# Altium PCB 00.Main.PcbDoc
Units mm, origin at the board's own origin, x right, y up, seen from the top; angles counter-clockwise.
Board outline 95 x 70 mm, 2 copper layers (Top Layer, Bottom Layer); 12 components, 14 nets, 78 pads, 6 vias.
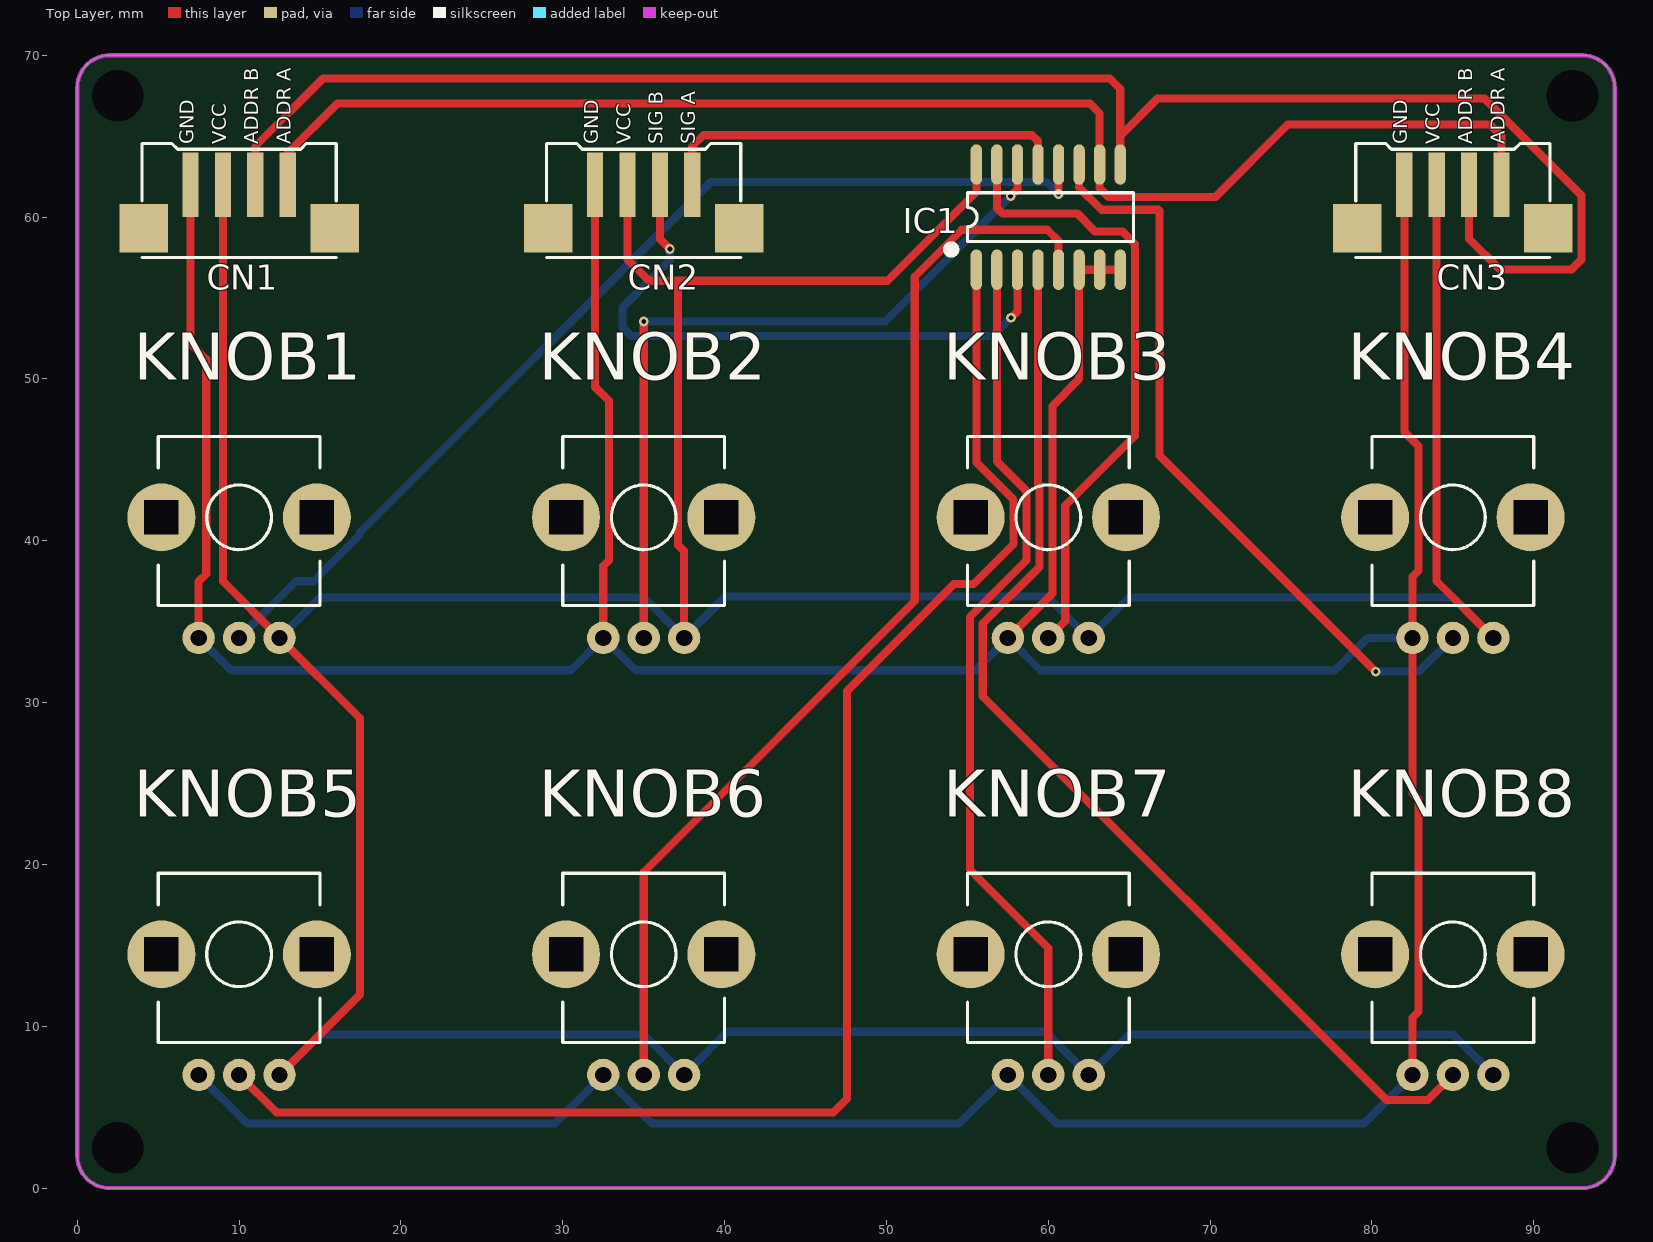
[diagram p0: Top Layer view]
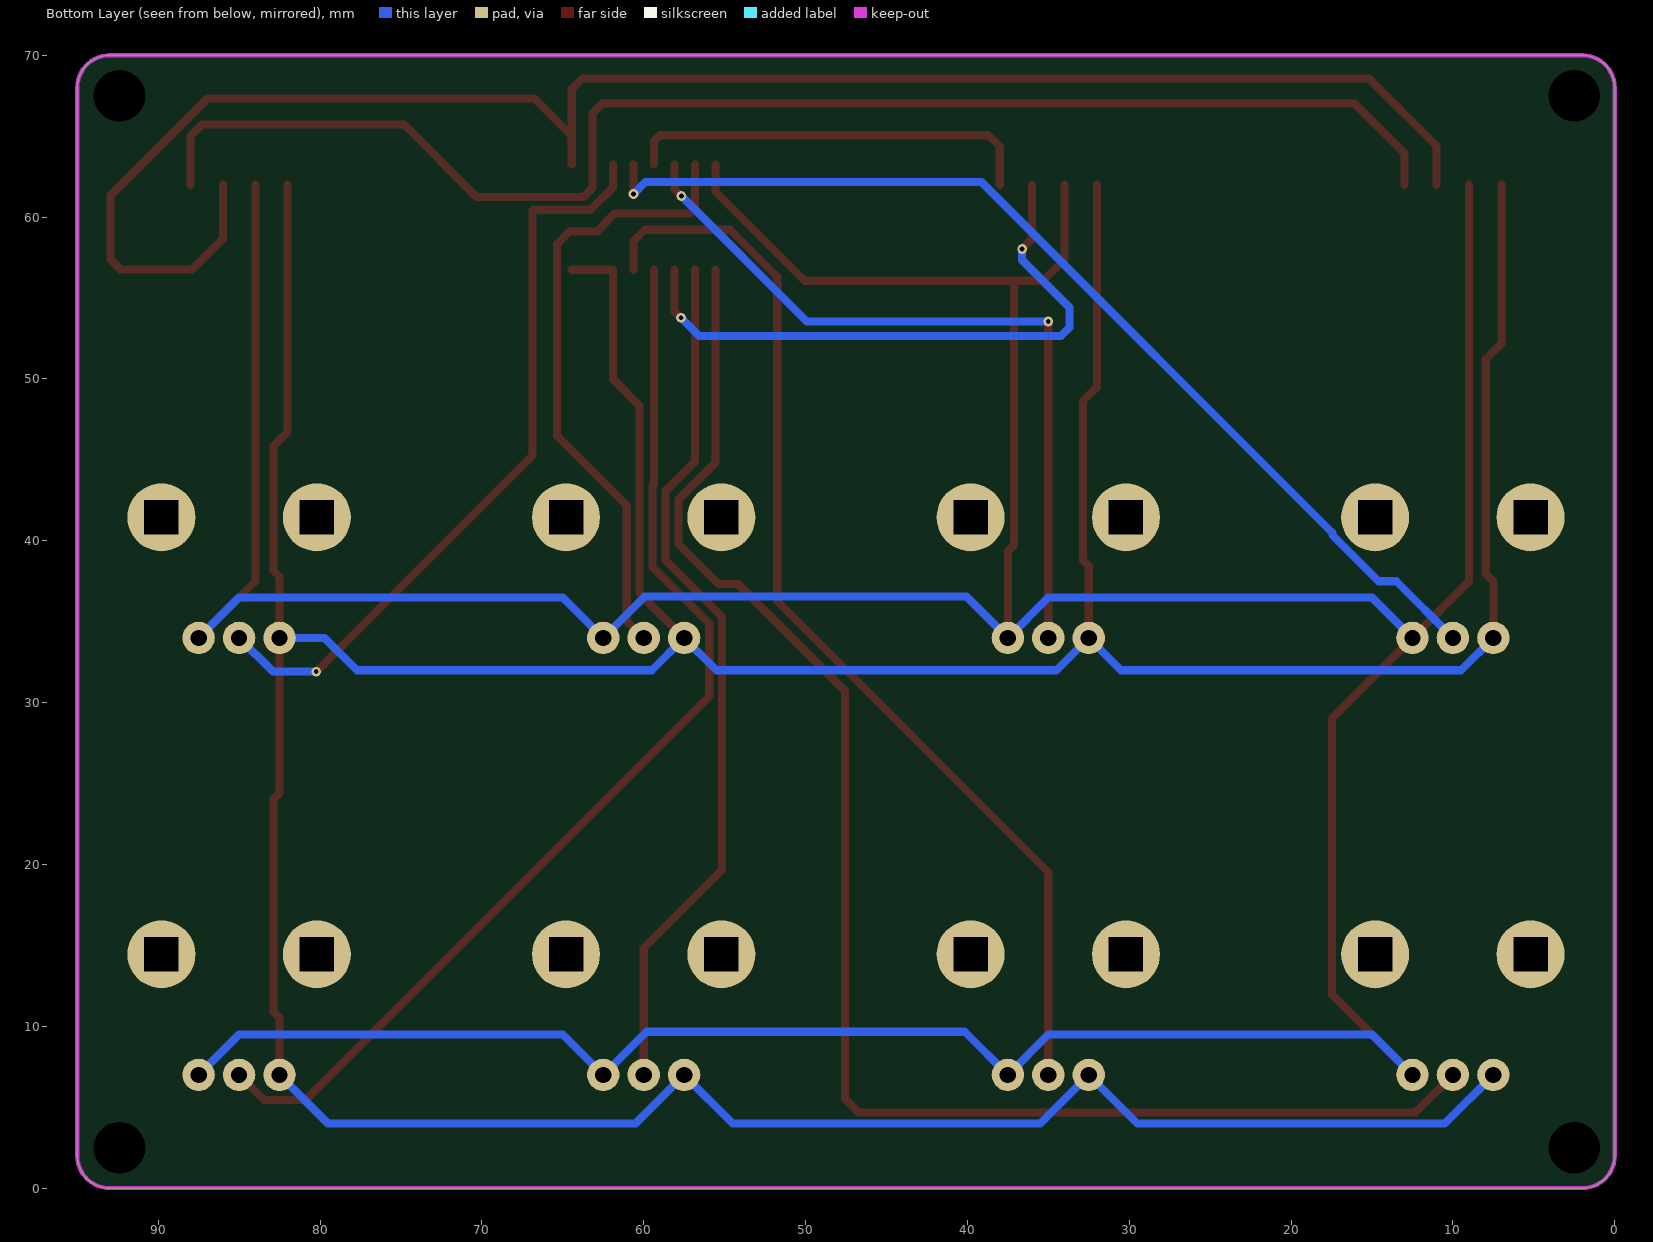
[diagram p1: Bottom Layer view, seen from below]

## Layer stack, top to bottom
Top Layer: signal copper 0.0356
Dielectric: dielectric 0.32, FR-4, Dk 4.8
Bottom Layer: signal copper 0.0356

## Board outline
0,2 0,68 cw(c2,68) 2,70 93,70 cw(c93,68) 95,68 95,2 cw(c93,2) 93,0 2,0 cw(c2,2)

## Design rules (kind name [scope] priority, off if disabled: settings)
Clearance [All] p1: gap=0.3
ComponentClearance [All] p1 off: gap=0.254 collisioncheckmode=3 verticalgap=0.254 showdistances=FALSE
HoleSize [All] p1: absolutevalues=TRUE maxlimit=30 minlimit=0.3 maxpercent=80.000 minpercent=20.000
PolygonConnect [All] p1: connectstyle=Relief reliefconductorwidth=0.5 reliefentries=4 polygonreliefangle="90 Angle" airgapwidth=0.5
RoutingVias [All] p1: holewidth=0.3 width=0.6 viastyle="Through Hole" minholewidth=0.3 minwidth=0.6 maxholewidth=0.3 maxwidth=0.6
SilkToSilkClearance [All] p1: silktosilkclearance=0
SilkToSolderMaskClearance [IsPad] p1: minsilkscreentomaskgap=0 clearancetoexposedcopper=TRUE
SolderMaskExpansion [All] p1: expansion=0.102
Width [All] p1: maxlimit=0.6 minlimit=0.3 preferedwidth=0.5 minimp=50.000000 maximp=50.000000 favimp=50.000000
24 further rules are at their usual default settings.

## Classes and differential pairs
component class "01.12 Knobs with 4052": CN1 CN2 IC1 KNOB1 KNOB2 KNOB3 KNOB4 KNOB5 KNOB6 KNOB7 KNOB8

## Components (designator, comment, footprint, x,y, rotation, side; value= is the part's Value field where it differs from the comment)
CN1 "2.54mm 1X4" GROVE-4P-180D 10,62 r0 top (schematic designator CN3)
CN2 "2.54mm 1X4" GROVE-4P-180D 35,62 r0 top (schematic designator CN1)
CN3 "2.54mm 1X4" GROVE-4P-180D 85,62 r0 top
IC1 "HD74HC4052P" SOIC16 60,60 r90 top
KNOB1 "VR Mono" RV09 10,34 r0 top
KNOB2 "VR Mono" RV09 35,34 r0 top
KNOB3 "VR Mono" RV09 60,34 r0 top
KNOB4 "VR Mono" RV09 85,34 r0 top
KNOB5 "VR Mono" RV09 10,7 r0 top
KNOB6 "VR Mono" RV09 35,7 r0 top
KNOB7 "VR Mono" RV09 60,7 r0 top
KNOB8 "VR Mono" RV09 85,7 r0 top

## Footprints (in the part's own frame and the unit in brackets; to place one, negate y for a bottom-side part, rotate by r counter-clockwise, add the part's x,y. Pads: shape width x height; smd on the part's side, far side on the other; paste and mask are expansions set on the pad)
GROVE-4P-180D [mm]
  rect 1x4 smd: 1(3,0) 2(1,0) 3(-1,0) 4(-3,0)
  rect 3x3 smd: ""(-5.9,-2.7) ""(5.9,-2.7)
  silkscreen extent -6,-4.5 6,2.55
RV09 [mm]
  round 4.2 hole 2.1 square: 0(-4.8,7.45) 0(4.8,7.45)
  round 2 hole 1: 1(-2.5,0) 2(0,0) 3(2.5,0)
  silkscreen extent -5,2 5,12.45
SOIC16 [mm]
  oval 2.5x0.7 smd: 1(-3.25,4.445) 2(-3.25,3.175) 3(-3.25,1.905) 4(-3.25,0.635) 5(-3.25,-0.635) 6(-3.25,-1.905) 7(-3.25,-3.175) 8(-3.25,-4.445) 9(3.25,-4.445) 10(3.25,-3.175) 11(3.25,-1.905) 12(3.25,-0.635) 13(3.25,0.635) 14(3.25,1.905) 15(3.25,3.175) 16(3.25,4.445)
  silkscreen extent -2.25,-5.27 1.5,6.25

## Part data
CN1 CN2 CN3: library part "Connector 1X4"
IC1: library part TC74HC4052AF

## Free pads (board coordinates)
  round 0 hole 3.2: 0(2.5,67.5) 0(2.5,2.5) 0(92.4,2.5) 0(92.4,67.5)

## Via types
v1: diameter 0.6, hole 0.3, Top Layer to Bottom Layer, 6 vias

## Nets (pads, with @x,y where several pads share a name; then routed paths per layer and width w, separated by ;. In a path a pad name is that pad's centre, name@x,y a point inside that pad or via, vN(x,y) a via of type N, cw(c..) or ccw(c..) an arc to the next point about the centre after c; other vN are vias at no path point)
ADDR_A: CN1.1 CN3.1 IC1.10 | length 88.5
  Top Layer w0.5: CN1.1 13,63.943 16.073,67.017 62.577,67.017 63.175,66.418 IC1.10 63.175,61.795 63.718,61.252 70.325,61.252 74.794,65.721 87.289,65.721 88,65.01 CN3.1
ADDR_B: CN1.2 CN3.2 IC1.9 | length 109.7
  Top Layer w0.5: CN1.2 11,64.375 15.191,68.566 63.796,68.566 64.445,67.917 64.445,65.01 ; IC1.9 64.445,65.01 ; CN3.2 86,58.66 87.905,56.755 92.32,56.755 92.955,57.39 92.955,61.327 86.961,67.321 66.756,67.321 64.445,65.01
GND: CN1.4 CN2.4 CN3.4 IC1.6 IC1.7 IC1.8 KNOB1.1 KNOB2.1 KNOB3.1 KNOB4.1 KNOB5.1 KNOB6.1 KNOB7.1 KNOB8.1 | length 302.5
  Top Layer w0.5: CN1.4 7,52.184 7.967,51.218 7.967,37.943 7.5,37.476 KNOB1.1 ; CN2.4 32,49.511 32.859,48.652 32.859,38.797 32.5,38.439 KNOB2.1 ; KNOB3.1 60.25,36.75 60.25,48.332 61.905,49.987 IC1.6 IC1.7 IC1.8 ; CN3.4 82,46.73 82.871,45.858 82.871,38.152 82.5,37.781 KNOB4.1 82.5,24.411 82.871,24.04 82.871,10.898 82.5,10.527 KNOB8.1
  Bottom Layer w0.5: KNOB5.1 10.5,4 29.5,4 KNOB6.1 35.5,4 54.5,4 KNOB7.1 60.5,4 79.5,4 KNOB8.1 ; KNOB1.1 9.5,32 30.5,32 KNOB2.1 34.5,32 55.5,32 KNOB3.1 59.5,32 77.725,32 79.725,34 KNOB4.1
KNOB1: IC1.12 KNOB1.2 | length 64.5
  Top Layer w0.5: v1(60.635,61.429) IC1.12
  Bottom Layer w0.5: KNOB1.2 13.5,37.5 14.598,37.5 17.45,40.352 17.45,40.495 39.117,62.162 59.902,62.162 v1(60.635,61.429)
KNOB2: IC1.14 KNOB2.2 | length 47.6
  Top Layer w0.5: KNOB2.2 v1(35,53.555) ; v1(57.674,61.302) 58.095,61.722 IC1.14
  Bottom Layer w0.5: v1(35,53.555) 49.927,53.555 v1(57.674,61.302)
KNOB3: IC1.15 KNOB3.2 | length 38.7
  Top Layer w0.5: IC1.15 56.825,62.152 56.824,60.565 57.177,60.213 61.802,60.213 62.895,59.12 64.575,59.12 65.345,58.349 65.345,46.468 61.05,42.173 61.05,35.05 KNOB3.2
KNOB4: IC1.11 KNOB4.2 | length 46.6
  Top Layer w0.5: IC1.11 61.905,61.835 63.288,60.452 66.818,60.452 66.869,60.402 66.869,45.274 v1(80.23,31.914)
  Bottom Layer w0.5: v1(80.23,31.914) 82.914,31.914 KNOB4.2
KNOB5: IC1.1 KNOB5.2 | length 96
  Top Layer w0.5: KNOB5.2 12.315,4.685 46.727,4.685 47.565,5.523 47.565,30.717 54.174,37.326 55.39,37.326 57.85,39.786 57.85,42.548 55.555,44.843 IC1.1
KNOB6: IC1.5 KNOB6.2 | length 68.4
  Top Layer w0.5: KNOB6.2 35,19.519 51.75,36.269 51.75,56.317 54.652,59.219 59.935,59.219 60.635,58.519 IC1.5
KNOB7: IC1.2 KNOB7.2 | length 54
  Top Layer w0.5: IC1.2 56.825,44.9 58.65,43.075 58.65,38.798 55.15,35.298 55.15,19.681 60,14.831 KNOB7.2
KNOB8: IC1.4 KNOB8.2 | length 67.9
  Top Layer w0.5: IC1.4 59.365,43.507 59.45,43.422 59.45,38.388 55.95,34.888 55.95,30.387 80.89,5.447 83.447,5.447 KNOB8.2
SIG_A: CN2.1 IC1.13 | length 25.6
  Top Layer w0.5: CN2.1 38,64.375 38.686,65.061 58.997,65.061 59.365,64.692 IC1.13
SIG_B: CN2.2 IC1.3 | length 38.1
  Top Layer w0.5: CN2.2 36,58.643 v1(36.618,58.025) ; v1(57.7,53.783) 58.095,54.178 IC1.3
  Bottom Layer w0.5: v1(36.618,58.025) 36.618,57.339 33.697,54.418 33.697,53.186 34.217,52.666 56.582,52.666 v1(57.7,53.783)
VCC: CN1.3 CN2.3 CN3.3 IC1.16 KNOB1.3 KNOB2.3 KNOB3.3 KNOB4.3 KNOB5.3 KNOB6.3 KNOB7.3 KNOB8.3 | length 305.5
  Top Layer w0.5: CN1.3 9,37.5 KNOB1.3 17.466,29.034 17.466,11.966 KNOB5.3 ; CN2.3 34,57.39 35.321,56.069 37.124,56.069 ; KNOB2.3 37.5,39.363 37.126,39.737 37.126,56.068 37.124,56.069 ; IC1.16 55.555,61.57 50.054,56.069 37.124,56.069 ; CN3.3 84,37.5 KNOB4.3
  Bottom Layer w0.5: KNOB5.3 15,9.5 35,9.5 KNOB6.3 40.163,9.663 59.837,9.663 KNOB7.3 65,9.5 85,9.5 KNOB8.3 ; KNOB1.3 15,36.5 35,36.5 KNOB2.3 40.062,36.562 59.938,36.562 KNOB3.3 65,36.5 85,36.5 KNOB4.3
pads on no net: CN1. CN2. CN3. KNOB1.0 KNOB2.0 KNOB3.0 KNOB4.0 KNOB5.0 KNOB6.0 KNOB7.0 KNOB8.0

## Keep-outs
Keep-Out Layer:
  the board outline again, w0.254

## Silkscreen, mask and mechanical layers (free items; w line width, h text height)
Top Overlay:
  text "GND" at 7.5,64.5 h1.52 r90
  text "VCC" at 9.5,64.5 h1.52 r90
  text "ADDR B" at 11.5,64.5 h1.52 r90
  text "ADDR A" at 13.5,64.5 h1.52 r90
  text "GND" at 32.5,64.5 h1.52 r90
  text "VCC" at 34.5,64.5 h1.52 r90
  text "SIG B" at 36.5,64.5 h1.52 r90
  text "SIG A" at 38.5,64.5 h1.52 r90
  text "GND" at 82.5,64.5 h1.52 r90
  text "VCC" at 84.5,64.5 h1.52 r90
  text "ADDR B" at 86.5,64.5 h1.52 r90
  text "ADDR A" at 88.5,64.5 h1.52 r90
Mechanical 3:
  circle w0.2: c89.8,41.45 r2.5
  circle w0.2: c80.2,41.45 r2.5
  circle w0.2: c64.8,41.45 r2.5
  circle w0.2: c55.2,41.45 r2.5
  circle w0.2: c39.8,41.45 r2.5
  circle w0.2: c30.2,41.45 r2.5
  circle w0.2: c14.8,41.45 r2.5
  circle w0.2: c5.2,41.45 r2.5
  circle w0.2: c14.8,14.45 r2.5
  circle w0.2: c5.2,14.45 r2.5
  circle w0.2: c39.8,14.45 r2.5
  circle w0.2: c30.2,14.45 r2.5
  circle w0.2: c64.8,14.45 r2.5
  circle w0.2: c55.2,14.45 r2.5
  circle w0.2: c80.2,14.45 r2.5
  circle w0.2: c89.8,14.45 r2.5
  circle w0.2: c92.4,2.5 r1.3
  circle w0.2: c92.4,67.5 r1.3
  circle w0.2: c2.5,67.5 r1.3
  circle w0.2: c2.5,2.5 r1.3
  lines w0.2: -3.008,1.274 -2.5,-0.25 ; -3.008,68.726 -2.5,70.25 ; -2.754,-0.25 -2.246,-0.25 ; -2.754,70.25 -2.246,70.25 ; -2.5,28.5 -2.5,-0.25 ; -2.5,41.5 -2.5,70.25 ; -1.992,1.274 -2.5,-0.25 ; -1.992,68.726 -2.5,70.25 ; -0.25,72.246 -0.25,72.754 ; 1.274,71.992 -0.25,72.5 ; 1.274,73.008 -0.25,72.5 ; 6,6 ccw(c6.5,6) 6.5,5.5 13.5,5.5 ccw(c13.5,6) 14,6 14,8 ccw(c13.5,8) 13.5,8.5 6.5,8.5 ccw(c6.5,8) 6,8 6,6 ; 31,6 ccw(c31.5,6) 31.5,5.5 38.5,5.5 ccw(c38.5,6) 39,6 39,8 ccw(c38.5,8) 38.5,8.5 31.5,8.5 ccw(c31.5,8) 31,8 31,6 ; 31,33 ccw(c31.5,33) 31.5,32.5 38.5,32.5 ccw(c38.5,33) 39,33 39,35 ccw(c38.5,35) 38.5,35.5 31.5,35.5 ccw(c31.5,35) 31,35 31,33 ; 41,72.5 -0.25,72.5 ; 54,72.5 95.25,72.5 ; 93.726,71.992 95.25,72.5 ; 93.726,73.008 95.25,72.5 ; 95.25,72.246 95.25,72.754 ; -0.25,2 ccw(c2,2) 2,-0.25 93,-0.25 ccw(c93,2) 95.25,2 95.25,68 ccw(c93,68) 93,70.25 2,70.25 ccw(c2,68) -0.25,68 -0.25,2 ; 6,33 ccw(c6.5,33) 6.5,32.5 13.5,32.5 ccw(c13.5,33) 14,33 14,35 ccw(c13.5,35) 13.5,35.5 6.5,35.5 ccw(c6.5,35) 6,35 6,33 ; 56,6 ccw(c56.5,6) 56.5,5.5 63.5,5.5 ccw(c63.5,6) 64,6 64,8 ccw(c63.5,8) 63.5,8.5 56.5,8.5 ccw(c56.5,8) 56,8 56,6 ; 56,33 ccw(c56.5,33) 56.5,32.5 63.5,32.5 ccw(c63.5,33) 64,33 64,35 ccw(c63.5,35) 63.5,35.5 56.5,35.5 ccw(c56.5,35) 56,35 56,33 ; 81,6 ccw(c81.5,6) 81.5,5.5 88.5,5.5 ccw(c88.5,6) 89,6 89,8 ccw(c88.5,8) 88.5,8.5 81.5,8.5 ccw(c81.5,8) 81,8 81,6 ; 81,33 ccw(c81.5,33) 81.5,32.5 88.5,32.5 ccw(c88.5,33) 89,33 89,35 ccw(c88.5,35) 88.5,35.5 81.5,35.5 ccw(c81.5,35) 81,35 81,33
  text "95.5 (mm)" at 41.254,71.586 h1.52
  text "70.5 (mm)" at -1.586,28.754 h1.52 r90